# Altium PCB PCB1.PcbDoc (part 5 of 5)
Units mil, origin at the board's own origin, x right, y up, seen from the top; angles counter-clockwise.
Board outline 1280 x 1960 mil, 2 copper layers (Top Layer, Bottom Layer); 43 components, 63 nets, 300 pads, 93 vias.
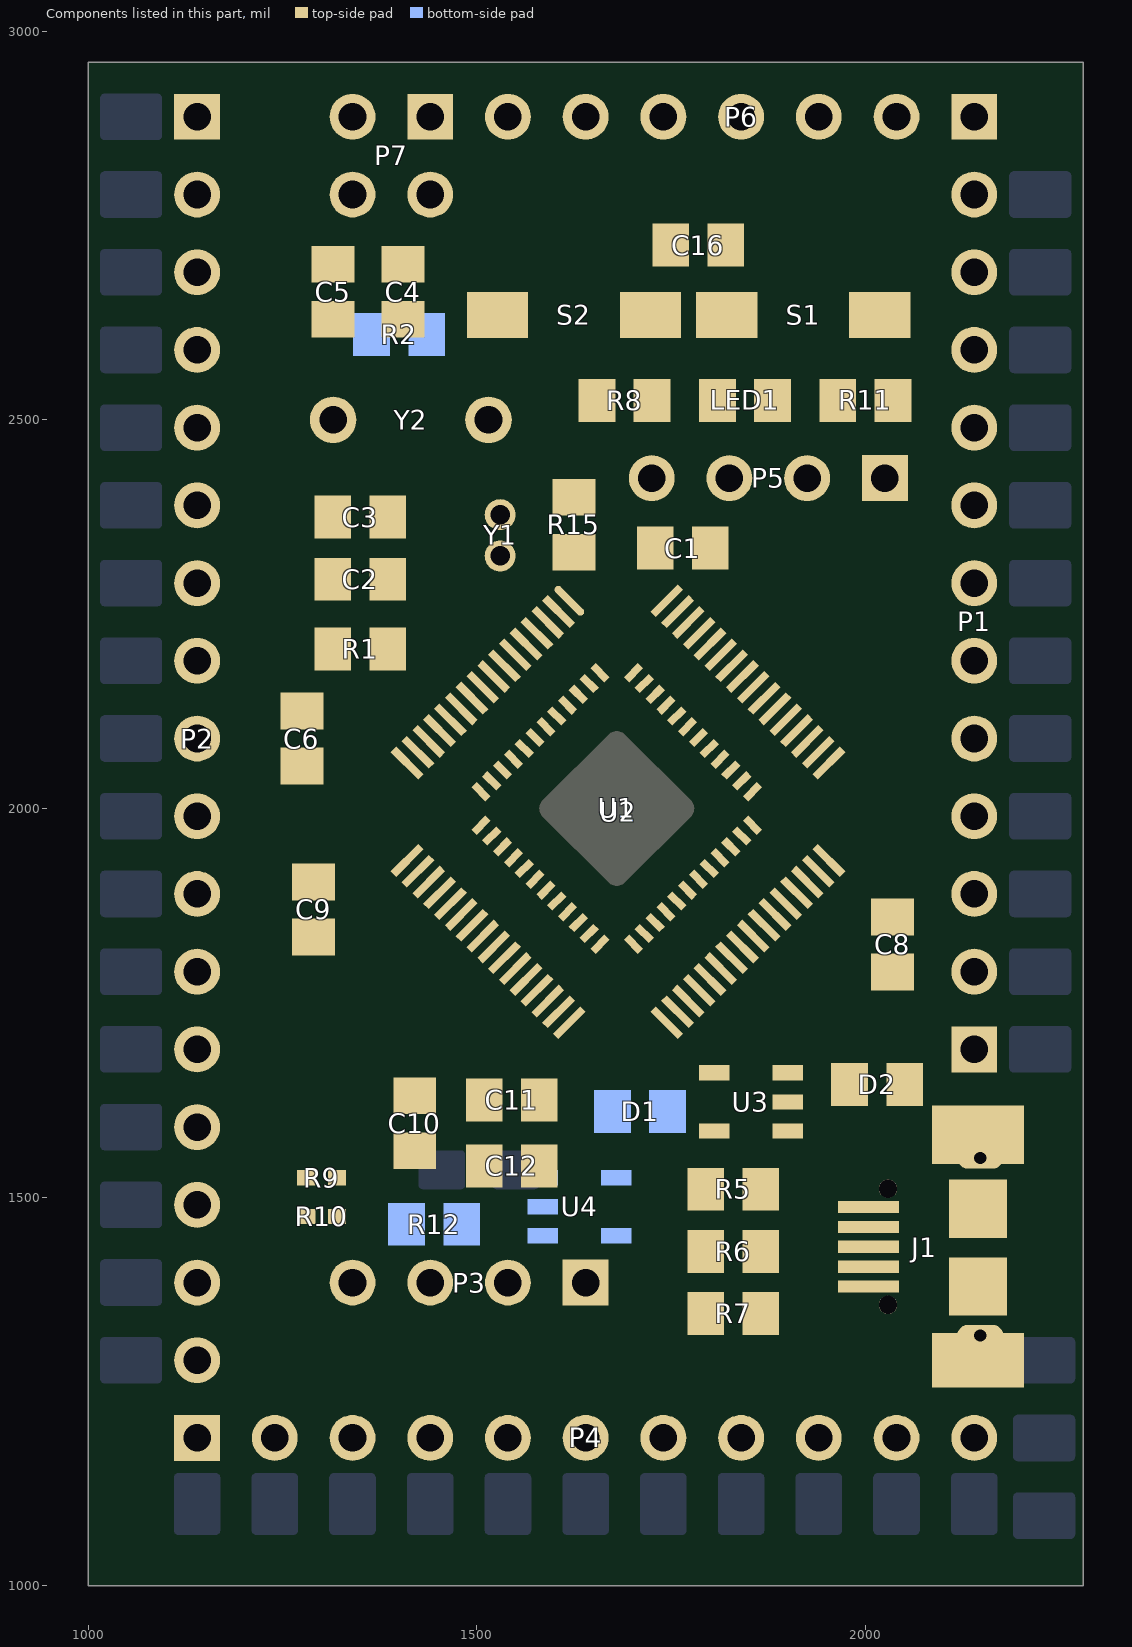
[diagram p5: the components of this part, seen from the top]

## Silkscreen, mask and mechanical layers (free items; w line width, h text height) (continued)
Bottom Overlay:
  text "B9" at 1555,2830 h75 r90
  text "B8" at 1655,2830 h75 r90
  text "B7" at 1755,2830 h75 r90
  text "B6" at 1855,2830 h75 r90
  text "B5" at 1955,2830 h75 r90
  text "B4" at 2020,2830 h75 r90
  text "B3" at 2080,2830 h75 r90
  text "C0" at 1275,2825 h75
  text "C1" at 1275,2770 h75
  text "D2" at 2080,2715 h75
  text "C2" at 1275,2670 h75
  text "C13" at 2080,2670 h75
  text "C12" at 2080,2575 h75
  text "C3" at 1275,2570 h75
  text "C11" at 2080,2480 h75
  text "C4" at 1275,2470 h75
  text "C5" at 1275,2370 h75
  text "C10" at 2080,2335 h75
  text "A0" at 1275,2270 h75
  text "C9" at 2080,2270 h75
  text "A1" at 1275,2170 h75
  text "C8" at 2080,2170 h75
  text "A2" at 1275,2070 h75
  text "C7" at 2080,2070 h75
  text "A3" at 1275,1970 h75
  text "C6" at 2080,1970 h75
  text "A" at 2065,1915 h75
  text "A4" at 1275,1870 h75
  text "15" at 2080,1870 h75
  text "A" at 2065,1815 h75
  text "A5" at 1275,1770 h75
  text "14" at 2080,1770 h75
  text "A" at 2065,1715 h75
  text "A6" at 1275,1670 h75
  text "13" at 2080,1670 h75
  text "A7" at 1275,1570 h75
  text "B-" at 1480,1570 h75
  text "B+" at 1585,1570 h75
  text "V1.3" at 2257.75,1535 h60 r90
  text "B0" at 1275,1470 h75
  text "B1" at 1275,1370 h75
  text "B2" at 1275,1320 h75
  text "10" at 1245,1310 h75 r90
  text "11" at 1295,1310 h75 r90
  text "12" at 1365,1310 h75 r90
  text "13" at 1465,1310 h75 r90
  text "14" at 1565,1310 h75 r90
  text "15" at 1665,1310 h75 r90
  text "A8" at 1765,1310 h75 r90
  text "A9" at 1865,1310 h75 r90
  text "10" at 1965,1310 h75 r90
  text "11" at 2065,1310 h75 r90
  text "12" at 2125,1310 h75 r90
  text "B" at 1415,1290 h75 r90
  text "B" at 1515,1290 h75 r90
  text "B" at 1615,1290 h75 r90
  text "A" at 1915,1290 h75 r90
  text "A" at 2015,1290 h75 r90